# EAGLE board esp_pilote  x8A (EAGLE 8.0.0)
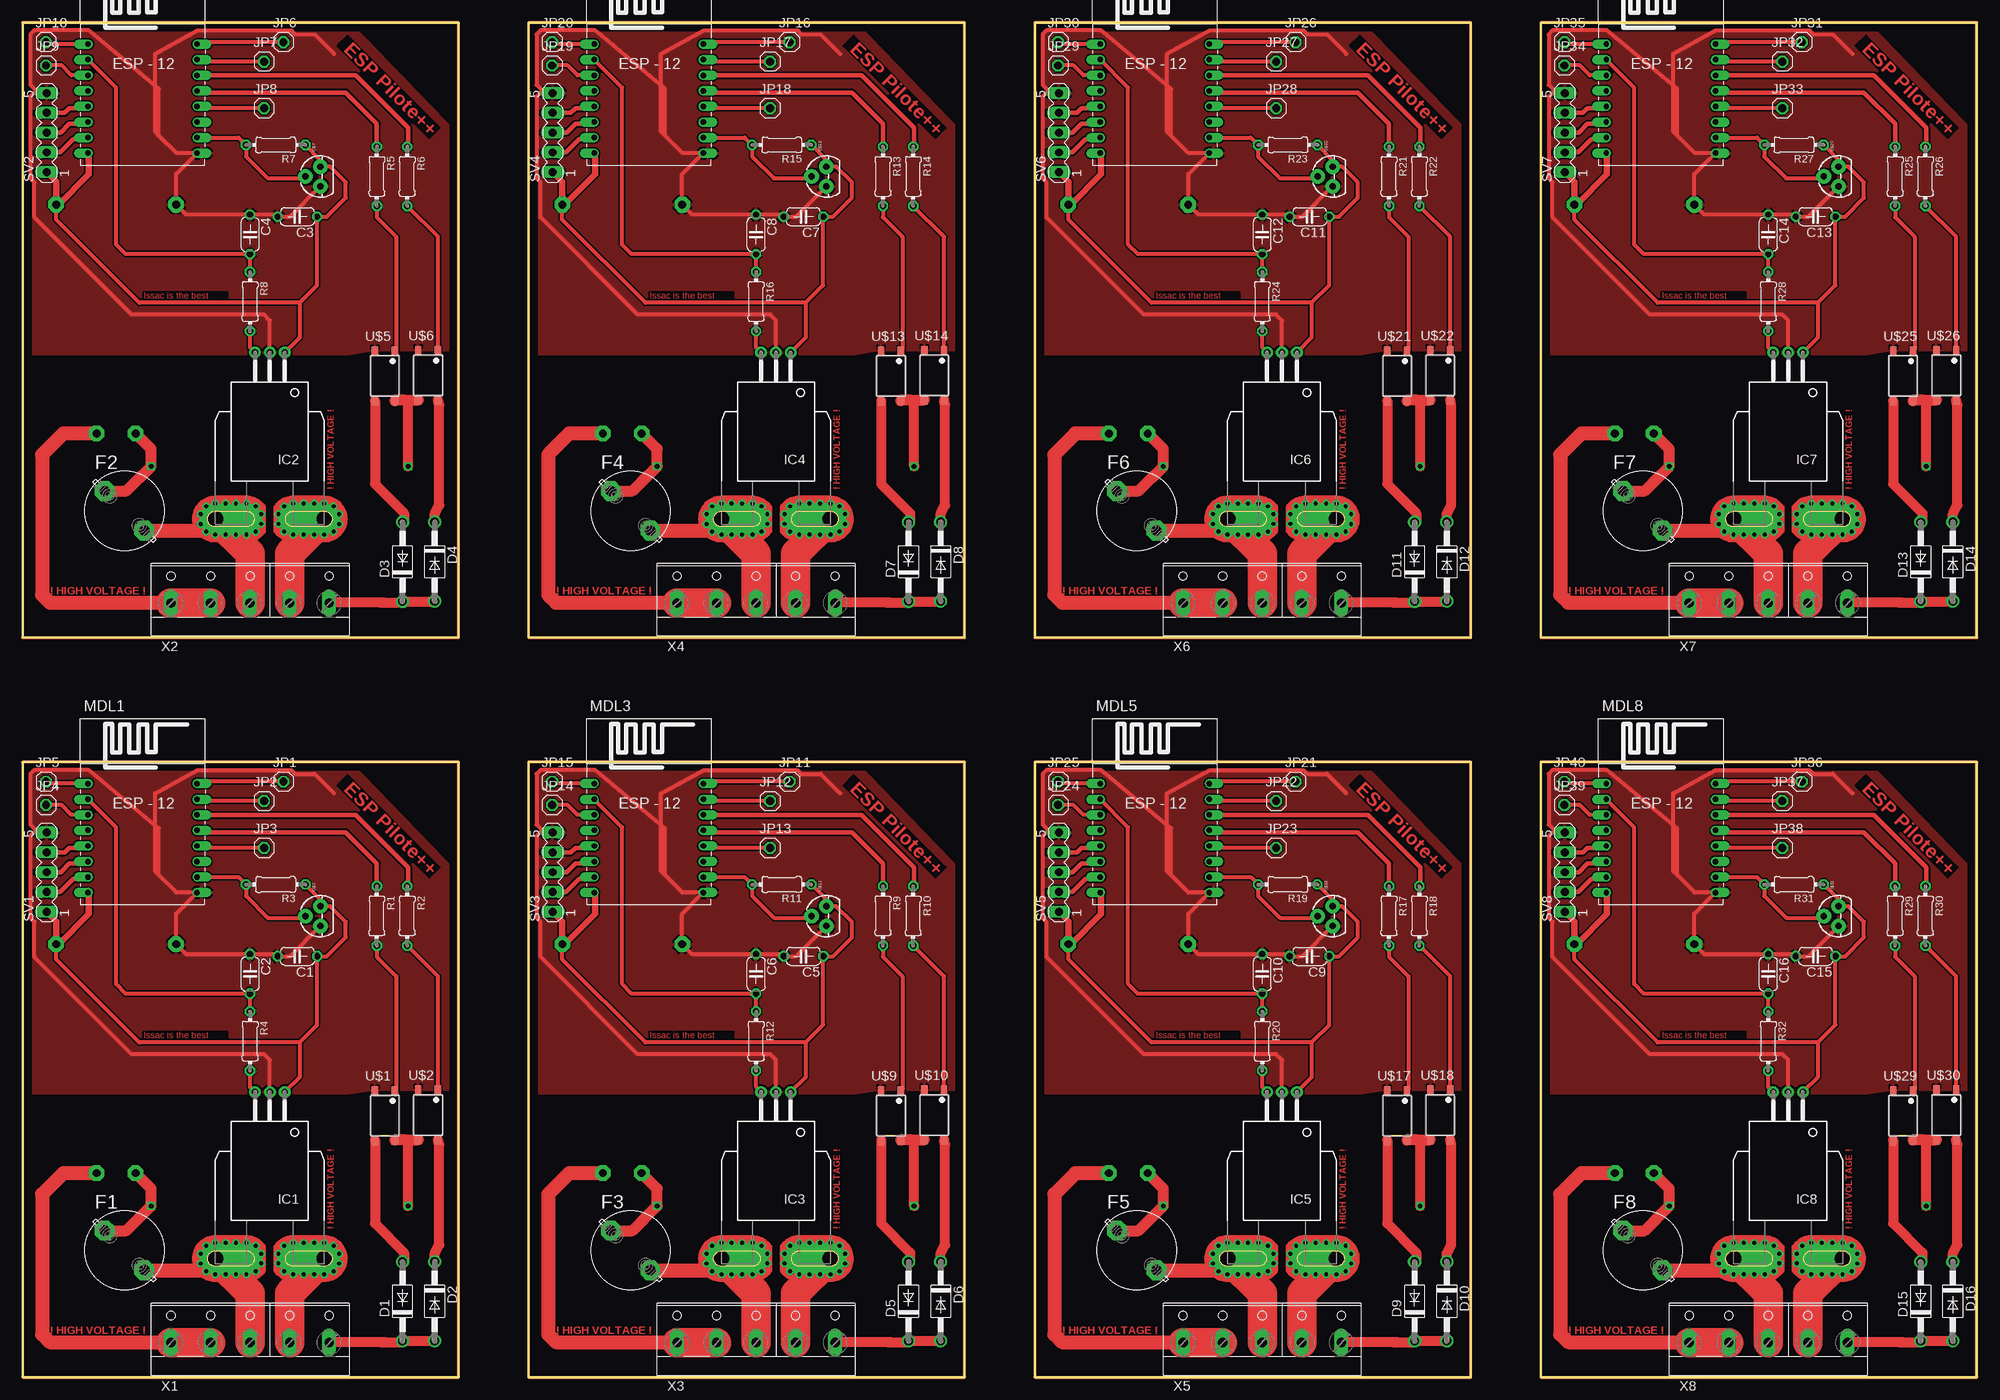
[diagram p0: board, top side]
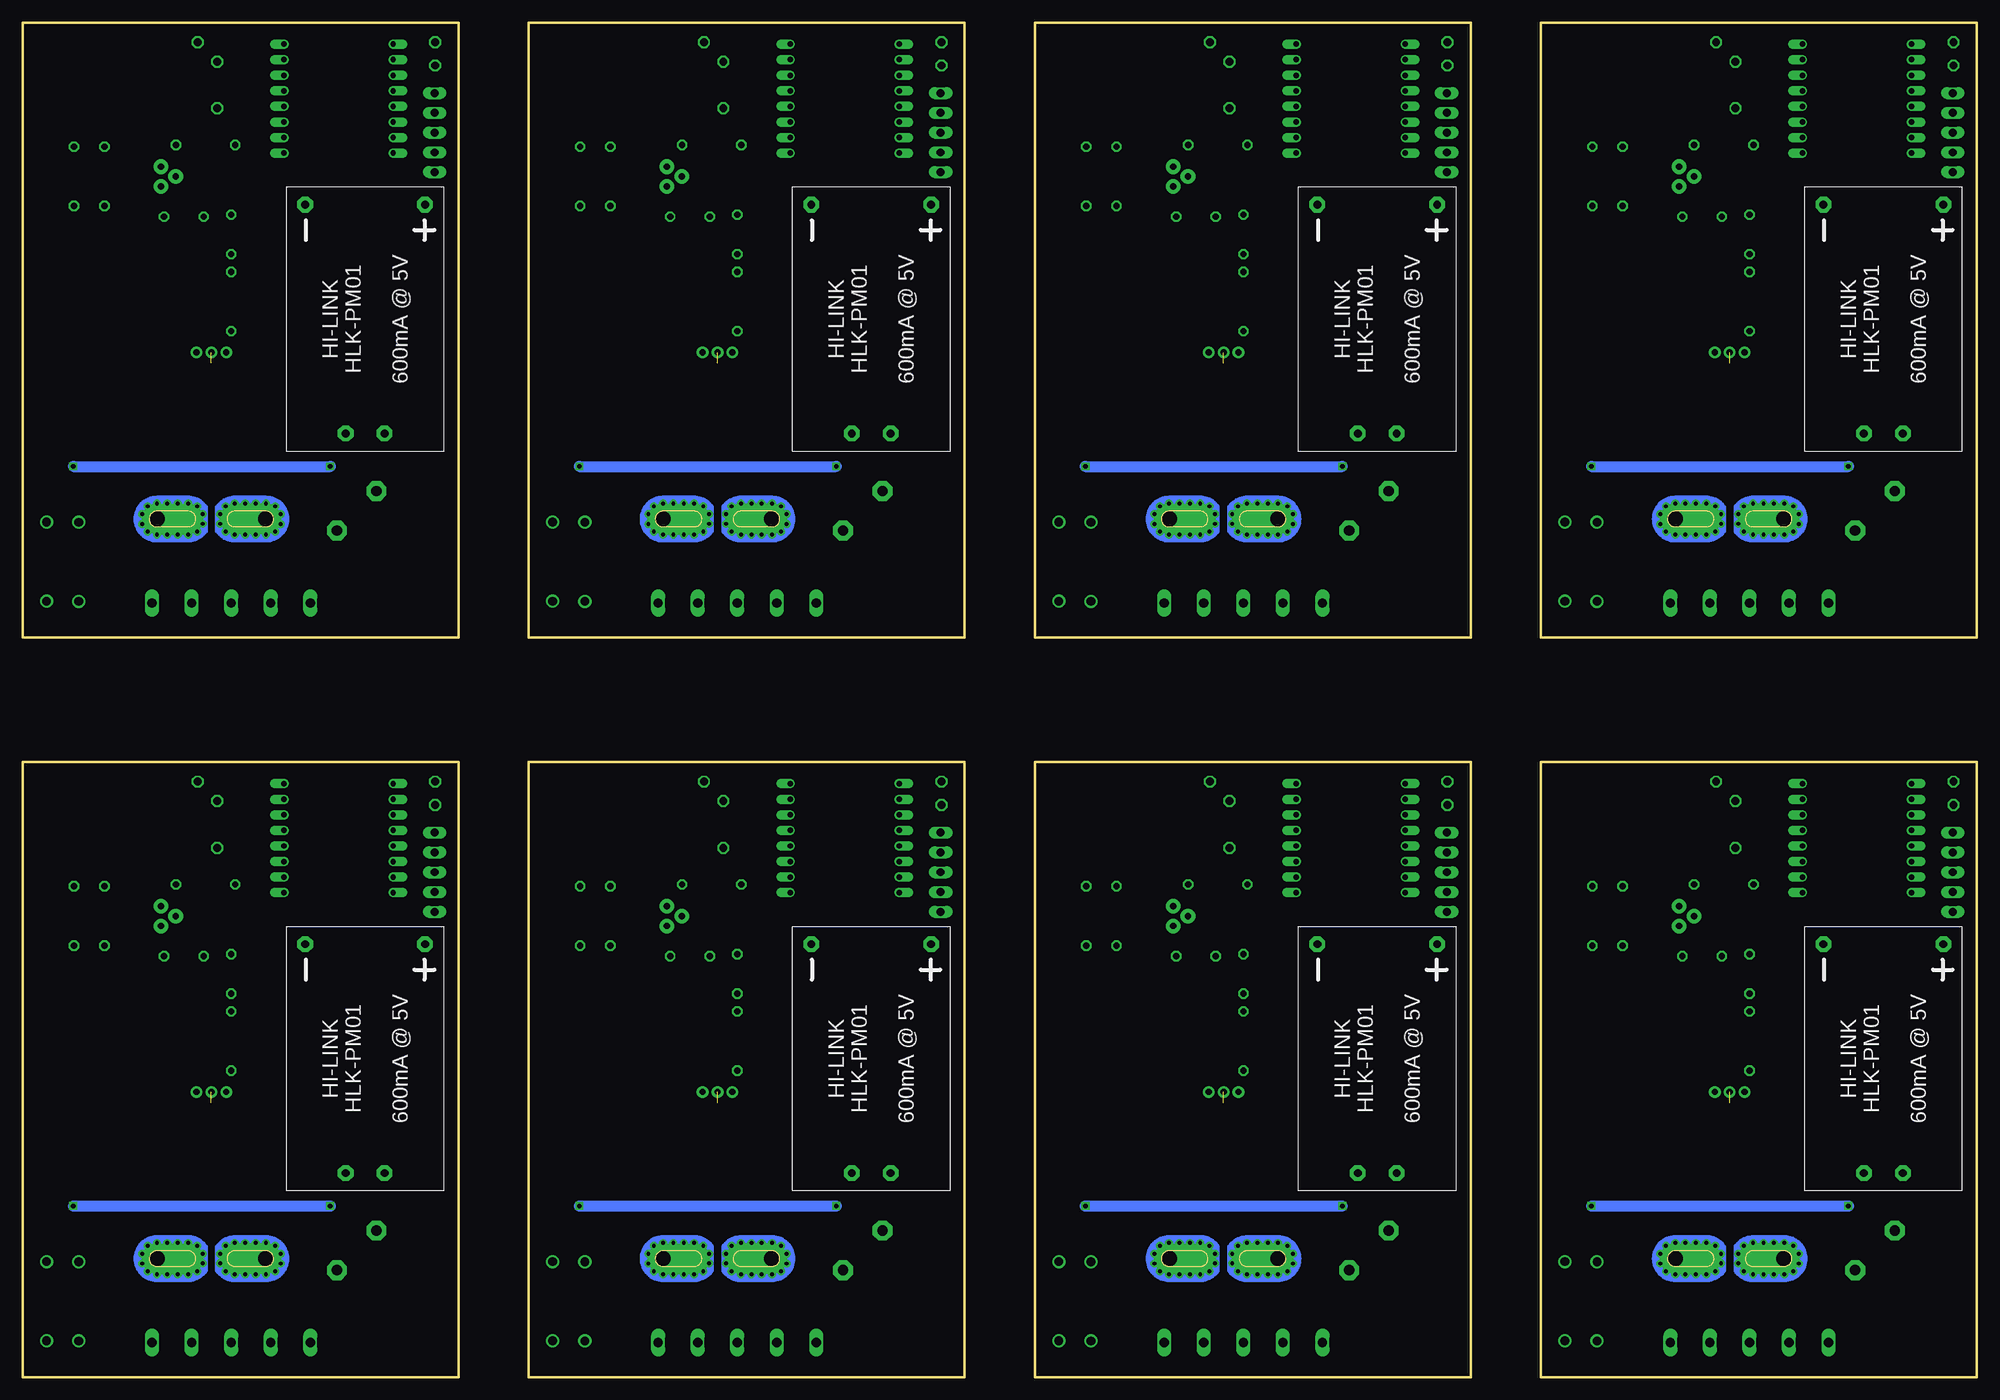
[diagram p1: board, bottom side, seen from below]

Size 251 x 174 mm. Coordinates in mm from the lower left corner, seen from the top.
Outline: 0,0 56,0 56,79 0,79 0,0
Outline: 0,95 56,95 56,174 0,174 0,95
Outline: 65,0 121,0 121,79 65,79 65,0
Outline: 65,95 121,95 121,174 65,174 65,95
Outline: 130,0 186,0 186,79 130,79 130,0
Outline: 130,95 186,95 186,174 130,174 130,95
Outline: 195,95 251,95 251,174 195,174 195,95
Outline: 195,0 251,0 251,79 195,79 195,0
Copper layers (1*16): Top 0.035mm / dielectric 1.5mm / Bottom 0.035mm
Design rules "default": minimum track width 10mil, minimum drill 24mil, track to track 8mil, track to pad 8mil, pad to pad 8mil, via to via 8mil, smd to smd 8mil, copper to edge 40mil, drill to drill 8mil, minimum pad ring 10mil, minimum via ring 8mil, stop-mask expansion 4mil, vias tented up to drill 0mil, thermal gap 10mil
Net classes: 0 default: width 0.5 mm; 1 15Amp: width 12 mm; 3 1Amp: width 0.3 mm

## Footprints (pad centres in the part's own frame; a part is rotated, then mirrored left to right if it is on the bottom)
C050-024X044 = drill 0.813 octagon: 1 -2.54,0; 2 2.54,0
DO41-10 = drill 1.118: A 5.08,0; C -5.08,0
19559 = drill 1.321 pad 2.54 octagon: 1 -2.54,2.54; 2 2.54,-2.54
CB-PFF = drill 0.8 pad 1.5: 1 -1.91,-21.4; 2 0,-21.4; 3 1.91,-21.4 | drill 2 pad 4 offset: IP+ 7,0; IP- -7,0 | drill 0.5 pad 0.9: IP+@2 8.89,0.635; IP+@3 8.89,-0.635; IP+@4 8.175,-1.625; IP+@5 7,-2; IP+@6 5.675,-2; IP+@7 4.35,-2; IP+@8 3,-2; IP+@9 1.825,-1.625; IP+@10 1.1,-0.625; IP+@11 1.1,0.625; IP+@12 1.825,1.625; IP+@13 3,2; IP+@14 4.35,2; IP+@15 5.675,2; IP+@16 7,2; IP+@17 8.175,1.625; IP-@2 -8.89,0.635; IP-@3 -8.89,-0.635; IP-@4 -8.175,-1.625; IP-@5 -7,-2; IP-@6 -5.675,-2; IP-@7 -4.325,-2; IP-@8 -3,-2; IP-@9 -1.825,-1.625; IP-@10 -1.1,-0.625; IP-@11 -1.1,0.625; IP-@12 -1.825,1.625; IP-@13 -3,2; IP-@14 -4.325,2; IP-@15 -5.675,2; IP-@16 -7,2; IP-@17 -8.175,1.625
1X01 = drill 1.016 octagon: 1 0,0
ESP12 = drill 0.7 offset: ADC -7.1,3.8; CH_PD -7.1,1.8; GND 6.9,-8.2; GPIO0 6.9,-2.2; GPIO2 6.9,-4.2; GPIO4 6.9,1.8; GPIO5 6.9,-0.2; GPIO12 -7.1,-4.2; GPIO13 -7.1,-6.2; GPIO14 -7.1,-2.2; GPIO15 6.9,-6.2; GPIO16 -7.1,-0.2; RESET -7.1,5.8; RX 6.9,3.8; TX 6.9,5.8; VCC -7.1,-8.2
0204/7 = drill 0.813 octagon: 1 -3.81,0; 2 3.81,0
MA05-1 = drill 1.016 long: 1 -5.08,0; 2 -2.54,0; 3 0,0; 4 2.54,0; 5 5.08,0
MFSOP-4 = smd 0.8 x 1.2: 1 2.54,0; 3 0,0; 4 0,-6.35; 6 2.54,-6.35
TO-92 = drill 0.813 pad 1.88: 1 -1.27,0; 2 0,1.905; 3 1.27,0
HLK-PM01 = drill 1 pad 2 octagon: AC_L -14.7,2.5; AC_N -14.7,-2.5; VO+ 14.7,-7.7; VO- 14.7,7.7
W237-5P = drill 1.194 long: 1 -10.16,-0.635; 2 -5.08,-0.635; 3 0,-0.635; 4 5.08,-0.635; 5 10.16,-0.635

## Placement (x,y rotation side)
C1  0,1µf  [C050-024X044]  35.29,54.07 180 top
C2  ?  [C050-024X044]  29.21,51.8 270 top
C3  0,1µf  [C050-024X044]  35.29,149.07 180 top
C4  ?  [C050-024X044]  29.21,146.8 270 top
C5  0,1µf  [C050-024X044]  100.29,54.07 180 top
C6  ?  [C050-024X044]  94.21,51.8 270 top
C7  0,1µf  [C050-024X044]  100.29,149.07 180 top
C8  ?  [C050-024X044]  94.21,146.8 270 top
C9  0,1µf  [C050-024X044]  165.29,54.07 180 top
C10  ?  [C050-024X044]  159.21,51.8 270 top
C11  0,1µf  [C050-024X044]  165.29,149.07 180 top
C12  ?  [C050-024X044]  159.21,146.8 270 top
C13  0,1µf  [C050-024X044]  230.29,149.07 180 top
C14  ?  [C050-024X044]  224.21,146.8 270 top
C15  0,1µf  [C050-024X044]  230.29,54.07 180 top
C16  ?  [C050-024X044]  224.21,51.8 270 top
D1  1N4007  [DO41-10]  48.79,9.75 90 top
D2  1N4007  [DO41-10]  52.92,9.76 270 top
D3  1N4007  [DO41-10]  48.79,104.75 90 top
D4  1N4007  [DO41-10]  52.92,104.76 270 top
D5  1N4007  [DO41-10]  113.79,9.75 90 top
D6  1N4007  [DO41-10]  117.92,9.76 270 top
D7  1N4007  [DO41-10]  113.79,104.75 90 top
D8  1N4007  [DO41-10]  117.92,104.76 270 top
D9  1N4007  [DO41-10]  178.79,9.75 90 top
D10  1N4007  [DO41-10]  182.92,9.76 270 top
D11  1N4007  [DO41-10]  178.79,104.75 90 top
D12  1N4007  [DO41-10]  182.92,104.76 270 top
D13  1N4007  [DO41-10]  243.79,104.75 90 top
D14  1N4007  [DO41-10]  247.92,104.76 270 top
D15  1N4007  [DO41-10]  243.79,9.75 90 top
D16  1N4007  [DO41-10]  247.92,9.76 270 top
F1  0,5A  [19559]  13.09,16.29 0 top
F2  0,5A  [19559]  13.09,111.29 0 top
F3  0,5A  [19559]  78.09,16.29 0 top
F4  0,5A  [19559]  78.09,111.29 0 top
F5  0,5A  [19559]  143.09,16.29 0 top
F6  0,5A  [19559]  143.09,111.29 0 top
F7  0,5A  [19559]  208.09,111.29 0 top
F8  0,5A  [19559]  208.09,16.29 0 top
IC1  ACS758LCB-050B-PFF-T  [CB-PFF]  31.75,15.24 180 top
IC2  ACS758LCB-050B-PFF-T  [CB-PFF]  31.75,110.24 180 top
IC3  ACS758LCB-050B-PFF-T  [CB-PFF]  96.75,15.24 180 top
IC4  ACS758LCB-050B-PFF-T  [CB-PFF]  96.75,110.24 180 top
IC5  ACS758LCB-050B-PFF-T  [CB-PFF]  161.75,15.24 180 top
IC6  ACS758LCB-050B-PFF-T  [CB-PFF]  161.75,110.24 180 top
IC7  ACS758LCB-050B-PFF-T  [CB-PFF]  226.75,110.24 180 top
IC8  ACS758LCB-050B-PFF-T  [CB-PFF]  226.75,15.24 180 top
JP1  [1X01]  33.5,76.5 0 top
JP2  [1X01]  31,74 0 top
JP3  [1X01]  31,68 0 top
JP4  [1X01]  3,73.5 0 top
JP5  [1X01]  3,76.5 0 top
JP6  [1X01]  33.5,171.5 0 top
JP7  [1X01]  31,169 0 top
JP8  [1X01]  31,163 0 top
JP9  [1X01]  3,168.5 0 top
JP10  [1X01]  3,171.5 0 top
JP11  [1X01]  98.5,76.5 0 top
JP12  [1X01]  96,74 0 top
JP13  [1X01]  96,68 0 top
JP14  [1X01]  68,73.5 0 top
JP15  [1X01]  68,76.5 0 top
JP16  [1X01]  98.5,171.5 0 top
JP17  [1X01]  96,169 0 top
JP18  [1X01]  96,163 0 top
JP19  [1X01]  68,168.5 0 top
JP20  [1X01]  68,171.5 0 top
JP21  [1X01]  163.5,76.5 0 top
JP22  [1X01]  161,74 0 top
JP23  [1X01]  161,68 0 top
JP24  [1X01]  133,73.5 0 top
JP25  [1X01]  133,76.5 0 top
JP26  [1X01]  163.5,171.5 0 top
JP27  [1X01]  161,169 0 top
JP28  [1X01]  161,163 0 top
JP29  [1X01]  133,168.5 0 top
JP30  [1X01]  133,171.5 0 top
JP31  [1X01]  228.5,171.5 0 top
JP32  [1X01]  226,169 0 top
JP33  [1X01]  226,163 0 top
JP34  [1X01]  198,168.5 0 top
JP35  [1X01]  198,171.5 0 top
JP36  [1X01]  228.5,76.5 0 top
JP37  [1X01]  226,74 0 top
JP38  [1X01]  226,68 0 top
JP39  [1X01]  198,73.5 0 top
JP40  [1X01]  198,76.5 0 top
MDL1  ESP  [ESP12]  15.51,70.44 0 top
MDL2  ESP  [ESP12]  15.51,165.44 0 top
MDL3  ESP  [ESP12]  80.51,70.44 0 top
MDL4  ESP  [ESP12]  80.51,165.44 0 top
MDL5  ESP  [ESP12]  145.51,70.44 0 top
MDL6  ESP  [ESP12]  145.51,165.44 0 top
MDL7  ESP  [ESP12]  210.51,165.44 0 top
MDL8  ESP  [ESP12]  210.51,70.44 0 top
R1  470  [0204/7]  45.5,59.26 270 top
R2  470  [0204/7]  49.39,59.26 270 top
R3  4.7k  [0204/7]  32.5,63.29 180 top
R4  ?  [0204/7]  29.21,43.18 270 top
R5  470  [0204/7]  45.5,154.26 270 top
R6  470  [0204/7]  49.39,154.26 270 top
R7  4.7k  [0204/7]  32.5,158.29 180 top
R8  ?  [0204/7]  29.21,138.18 270 top
R9  470  [0204/7]  110.5,59.26 270 top
R10  470  [0204/7]  114.39,59.26 270 top
R11  4.7k  [0204/7]  97.5,63.29 180 top
R12  ?  [0204/7]  94.21,43.18 270 top
R13  470  [0204/7]  110.5,154.26 270 top
R14  470  [0204/7]  114.39,154.26 270 top
R15  4.7k  [0204/7]  97.5,158.29 180 top
R16  ?  [0204/7]  94.21,138.18 270 top
R17  470  [0204/7]  175.5,59.26 270 top
R18  470  [0204/7]  179.39,59.26 270 top
R19  4.7k  [0204/7]  162.5,63.29 180 top
R20  ?  [0204/7]  159.21,43.18 270 top
R21  470  [0204/7]  175.5,154.26 270 top
R22  470  [0204/7]  179.39,154.26 270 top
R23  4.7k  [0204/7]  162.5,158.29 180 top
R24  ?  [0204/7]  159.21,138.18 270 top
R25  470  [0204/7]  240.5,154.26 270 top
R26  470  [0204/7]  244.39,154.26 270 top
R27  4.7k  [0204/7]  227.5,158.29 180 top
R28  ?  [0204/7]  224.21,138.18 270 top
R29  470  [0204/7]  240.5,59.26 270 top
R30  470  [0204/7]  244.39,59.26 270 top
R31  4.7k  [0204/7]  227.5,63.29 180 top
R32  ?  [0204/7]  224.21,43.18 270 top
SV1  [MA05-1]  3.09,64.87 90 top
SV2  [MA05-1]  3.09,159.87 90 top
SV3  [MA05-1]  68.09,64.87 90 top
SV4  [MA05-1]  68.09,159.87 90 top
SV5  [MA05-1]  133.09,64.87 90 top
SV6  [MA05-1]  133.09,159.87 90 top
SV7  [MA05-1]  198.09,159.87 90 top
SV8  [MA05-1]  198.09,64.87 90 top
U$1  TLP168J  [MFSOP-4]  45.26,36.79 0 top
U$2  TLP168J  [MFSOP-4]  50.81,36.87 0 top
U$3  TEMPERATURE-SENSOR  [TO-92]  38.24,59.23 90 top
U$4  MAINS_CONVERTERS  [HLK-PM01]  12.01,40.92 90 bottom
U$5  TLP168J  [MFSOP-4]  45.26,131.79 0 top
U$6  TLP168J  [MFSOP-4]  50.81,131.87 0 top
U$7  TEMPERATURE-SENSOR  [TO-92]  38.24,154.23 90 top
U$8  MAINS_CONVERTERS  [HLK-PM01]  12.01,135.92 90 bottom
U$9  TLP168J  [MFSOP-4]  110.26,36.79 0 top
U$10  TLP168J  [MFSOP-4]  115.81,36.87 0 top
U$11  TEMPERATURE-SENSOR  [TO-92]  103.24,59.23 90 top
U$12  MAINS_CONVERTERS  [HLK-PM01]  77.01,40.92 90 bottom
U$13  TLP168J  [MFSOP-4]  110.26,131.79 0 top
U$14  TLP168J  [MFSOP-4]  115.81,131.87 0 top
U$15  TEMPERATURE-SENSOR  [TO-92]  103.24,154.23 90 top
U$16  MAINS_CONVERTERS  [HLK-PM01]  77.01,135.92 90 bottom
U$17  TLP168J  [MFSOP-4]  175.26,36.79 0 top
U$18  TLP168J  [MFSOP-4]  180.81,36.87 0 top
U$19  TEMPERATURE-SENSOR  [TO-92]  168.24,59.23 90 top
U$20  MAINS_CONVERTERS  [HLK-PM01]  142.01,40.92 90 bottom
U$21  TLP168J  [MFSOP-4]  175.26,131.79 0 top
U$22  TLP168J  [MFSOP-4]  180.81,131.87 0 top
U$23  TEMPERATURE-SENSOR  [TO-92]  168.24,154.23 90 top
U$24  MAINS_CONVERTERS  [HLK-PM01]  142.01,135.92 90 bottom
U$25  TLP168J  [MFSOP-4]  240.26,131.79 0 top
U$26  TLP168J  [MFSOP-4]  245.81,131.87 0 top
U$27  TEMPERATURE-SENSOR  [TO-92]  233.24,154.23 90 top
U$28  MAINS_CONVERTERS  [HLK-PM01]  207.01,135.92 90 bottom
U$29  TLP168J  [MFSOP-4]  240.26,36.79 0 top
U$30  TLP168J  [MFSOP-4]  245.81,36.87 0 top
U$31  TEMPERATURE-SENSOR  [TO-92]  233.24,59.23 90 top
U$32  MAINS_CONVERTERS  [HLK-PM01]  207.01,40.92 90 bottom
X1  [W237-5P]  29.21,5.08 0 top
X2  [W237-5P]  29.21,100.08 0 top
X3  [W237-5P]  94.21,5.08 0 top
X4  [W237-5P]  94.21,100.08 0 top
X5  [W237-5P]  159.21,5.08 0 top
X6  [W237-5P]  159.21,100.08 0 top
X7  [W237-5P]  224.21,100.08 0 top
X8  [W237-5P]  224.21,5.08 0 top

## Library data of the parts
C1-C16 = resistor
D1-D16 = diode
F1-F8 = fuse; MPN: 55900000001; OC_FARNELL: 9516360; OC_NEWARK: 02P0286
IC1-IC8 = allegro; MPN: ACS758LCB-050B-PFF-T; OC_FARNELL: 1718997; OC_NEWARK: 04R7131
JP1-JP40 = pinhead
MDL1-MDL8 = esp8266modules
R1-R32 = rcl
SV1-SV8 = con-lstb; OC_FARNELL: unknown; OC_NEWARK: unknown
U$1 U$2 U$5 U$6 U$9 U$10 U$13 U$14 U$17 U$18 U$21 U$22 U$25 U$26 U$29 U$30 = TLP168J
U$3 U$7 U$11 U$15 U$19 U$23 U$27 U$31 = Eagle-JeeLabs
U$4 U$8 U$12 U$16 U$20 U$24 U$28 U$32 = captain-slow
X1-X8 = con-wago-508; OC_FARNELL: unknown; OC_NEWARK: unknown

## Nets
230FUSED [1Amp]: F1.1 U$1.6 U$2.4 U$4.AC_L
230FUSED1 [1Amp]: F2.1 U$5.6 U$6.4 U$8.AC_L
230FUSED2 [1Amp]: F3.1 U$9.6 U$10.4 U$12.AC_L
230FUSED3 [1Amp]: F4.1 U$13.6 U$14.4 U$16.AC_L
230FUSED4 [1Amp]: F5.1 U$17.6 U$18.4 U$20.AC_L
230FUSED5 [1Amp]: F6.1 U$21.6 U$22.4 U$24.AC_L
230FUSED6 [1Amp]: F7.1 U$25.6 U$26.4 U$28.AC_L
230FUSED7 [1Amp]: F8.1 U$29.6 U$30.4 U$32.AC_L
230IN [15Amp]: F1.2 IC1.IP+ IC1.IP+@2 IC1.IP+@3 IC1.IP+@4 IC1.IP+@5 IC1.IP+@6 IC1.IP+@7 IC1.IP+@8 IC1.IP+@9 IC1.IP+@10 IC1.IP+@11 IC1.IP+@12 IC1.IP+@13 IC1.IP+@14 IC1.IP+@15 IC1.IP+@16 IC1.IP+@17 X1.3
230IN1 [15Amp]: F2.2 IC2.IP+ IC2.IP+@2 IC2.IP+@3 IC2.IP+@4 IC2.IP+@5 IC2.IP+@6 IC2.IP+@7 IC2.IP+@8 IC2.IP+@9 IC2.IP+@10 IC2.IP+@11 IC2.IP+@12 IC2.IP+@13 IC2.IP+@14 IC2.IP+@15 IC2.IP+@16 IC2.IP+@17 X2.3
230IN2 [15Amp]: F3.2 IC3.IP+ IC3.IP+@2 IC3.IP+@3 IC3.IP+@4 IC3.IP+@5 IC3.IP+@6 IC3.IP+@7 IC3.IP+@8 IC3.IP+@9 IC3.IP+@10 IC3.IP+@11 IC3.IP+@12 IC3.IP+@13 IC3.IP+@14 IC3.IP+@15 IC3.IP+@16 IC3.IP+@17 X3.3
230IN3 [15Amp]: F4.2 IC4.IP+ IC4.IP+@2 IC4.IP+@3 IC4.IP+@4 IC4.IP+@5 IC4.IP+@6 IC4.IP+@7 IC4.IP+@8 IC4.IP+@9 IC4.IP+@10 IC4.IP+@11 IC4.IP+@12 IC4.IP+@13 IC4.IP+@14 IC4.IP+@15 IC4.IP+@16 IC4.IP+@17 X4.3
230IN4 [15Amp]: F5.2 IC5.IP+ IC5.IP+@2 IC5.IP+@3 IC5.IP+@4 IC5.IP+@5 IC5.IP+@6 IC5.IP+@7 IC5.IP+@8 IC5.IP+@9 IC5.IP+@10 IC5.IP+@11 IC5.IP+@12 IC5.IP+@13 IC5.IP+@14 IC5.IP+@15 IC5.IP+@16 IC5.IP+@17 X5.3
230IN5 [15Amp]: F6.2 IC6.IP+ IC6.IP+@2 IC6.IP+@3 IC6.IP+@4 IC6.IP+@5 IC6.IP+@6 IC6.IP+@7 IC6.IP+@8 IC6.IP+@9 IC6.IP+@10 IC6.IP+@11 IC6.IP+@12 IC6.IP+@13 IC6.IP+@14 IC6.IP+@15 IC6.IP+@16 IC6.IP+@17 X6.3
230IN6 [15Amp]: F7.2 IC7.IP+ IC7.IP+@2 IC7.IP+@3 IC7.IP+@4 IC7.IP+@5 IC7.IP+@6 IC7.IP+@7 IC7.IP+@8 IC7.IP+@9 IC7.IP+@10 IC7.IP+@11 IC7.IP+@12 IC7.IP+@13 IC7.IP+@14 IC7.IP+@15 IC7.IP+@16 IC7.IP+@17 X7.3
230IN7 [15Amp]: F8.2 IC8.IP+ IC8.IP+@2 IC8.IP+@3 IC8.IP+@4 IC8.IP+@5 IC8.IP+@6 IC8.IP+@7 IC8.IP+@8 IC8.IP+@9 IC8.IP+@10 IC8.IP+@11 IC8.IP+@12 IC8.IP+@13 IC8.IP+@14 IC8.IP+@15 IC8.IP+@16 IC8.IP+@17 X8.3
230OUT [15Amp]: IC1.IP- IC1.IP-@2 IC1.IP-@3 IC1.IP-@4 IC1.IP-@5 IC1.IP-@6 IC1.IP-@7 IC1.IP-@8 IC1.IP-@9 IC1.IP-@10 IC1.IP-@11 IC1.IP-@12 IC1.IP-@13 IC1.IP-@14 IC1.IP-@15 IC1.IP-@16 IC1.IP-@17 X1.4
230OUT1 [15Amp]: IC2.IP- IC2.IP-@2 IC2.IP-@3 IC2.IP-@4 IC2.IP-@5 IC2.IP-@6 IC2.IP-@7 IC2.IP-@8 IC2.IP-@9 IC2.IP-@10 IC2.IP-@11 IC2.IP-@12 IC2.IP-@13 IC2.IP-@14 IC2.IP-@15 IC2.IP-@16 IC2.IP-@17 X2.4
230OUT2 [15Amp]: IC3.IP- IC3.IP-@2 IC3.IP-@3 IC3.IP-@4 IC3.IP-@5 IC3.IP-@6 IC3.IP-@7 IC3.IP-@8 IC3.IP-@9 IC3.IP-@10 IC3.IP-@11 IC3.IP-@12 IC3.IP-@13 IC3.IP-@14 IC3.IP-@15 IC3.IP-@16 IC3.IP-@17 X3.4
230OUT3 [15Amp]: IC4.IP- IC4.IP-@2 IC4.IP-@3 IC4.IP-@4 IC4.IP-@5 IC4.IP-@6 IC4.IP-@7 IC4.IP-@8 IC4.IP-@9 IC4.IP-@10 IC4.IP-@11 IC4.IP-@12 IC4.IP-@13 IC4.IP-@14 IC4.IP-@15 IC4.IP-@16 IC4.IP-@17 X4.4
230OUT4 [15Amp]: IC5.IP- IC5.IP-@2 IC5.IP-@3 IC5.IP-@4 IC5.IP-@5 IC5.IP-@6 IC5.IP-@7 IC5.IP-@8 IC5.IP-@9 IC5.IP-@10 IC5.IP-@11 IC5.IP-@12 IC5.IP-@13 IC5.IP-@14 IC5.IP-@15 IC5.IP-@16 IC5.IP-@17 X5.4
230OUT5 [15Amp]: IC6.IP- IC6.IP-@2 IC6.IP-@3 IC6.IP-@4 IC6.IP-@5 IC6.IP-@6 IC6.IP-@7 IC6.IP-@8 IC6.IP-@9 IC6.IP-@10 IC6.IP-@11 IC6.IP-@12 IC6.IP-@13 IC6.IP-@14 IC6.IP-@15 IC6.IP-@16 IC6.IP-@17 X6.4
230OUT6 [15Amp]: IC7.IP- IC7.IP-@2 IC7.IP-@3 IC7.IP-@4 IC7.IP-@5 IC7.IP-@6 IC7.IP-@7 IC7.IP-@8 IC7.IP-@9 IC7.IP-@10 IC7.IP-@11 IC7.IP-@12 IC7.IP-@13 IC7.IP-@14 IC7.IP-@15 IC7.IP-@16 IC7.IP-@17 X7.4
230OUT7 [15Amp]: IC8.IP- IC8.IP-@2 IC8.IP-@3 IC8.IP-@4 IC8.IP-@5 IC8.IP-@6 IC8.IP-@7 IC8.IP-@8 IC8.IP-@9 IC8.IP-@10 IC8.IP-@11 IC8.IP-@12 IC8.IP-@13 IC8.IP-@14 IC8.IP-@15 IC8.IP-@16 IC8.IP-@17 X8.4
CURRENT: C2.2 MDL1.ADC R4.1
CURRENT1: C4.2 MDL2.ADC R8.1
CURRENT2: C6.2 MDL3.ADC R12.1
CURRENT3: C8.2 MDL4.ADC R16.1
CURRENT4: C10.2 MDL5.ADC R20.1
CURRENT5: C12.2 MDL6.ADC R24.1
CURRENT6: C14.2 MDL7.ADC R28.1
CURRENT7: C16.2 MDL8.ADC R32.1
GND: C1.2 C2.1 IC1.2 MDL1.GND SV1.5 U$1.3 U$2.3 U$3.1 U$4.VO-
GND1: C3.2 C4.1 IC2.2 MDL2.GND SV2.5 U$5.3 U$6.3 U$7.1 U$8.VO-
GND2: C5.2 C6.1 IC3.2 MDL3.GND SV3.5 U$9.3 U$10.3 U$11.1 U$12.VO-
GND3: C7.2 C8.1 IC4.2 MDL4.GND SV4.5 U$13.3 U$14.3 U$15.1 U$16.VO-
GND4: C9.2 C10.1 IC5.2 MDL5.GND SV5.5 U$17.3 U$18.3 U$19.1 U$20.VO-
GND5: C11.2 C12.1 IC6.2 MDL6.GND SV6.5 U$21.3 U$22.3 U$23.1 U$24.VO-
GND6: C13.2 C14.1 IC7.2 MDL7.GND SV7.5 U$25.3 U$26.3 U$27.1 U$28.VO-
GND7: C15.2 C16.1 IC8.2 MDL8.GND SV8.5 U$29.3 U$30.3 U$31.1 U$32.VO-
N$1 [1Amp]: D2.C U$2.6
N$2: R1.2 U$1.1
N$3: IC1.3 R4.2
N$4 [1Amp]: D1.A U$1.4
N$5 [1Amp]: MDL1.GPIO13 SV1.2
N$6 [1Amp]: MDL1.GPIO12 SV1.3
N$7 [1Amp]: MDL1.GPIO14 SV1.4
N$8: R2.2 U$2.1
N$9: MDL1.GPIO15 R3.2 U$3.2
N$10 [1Amp]: MDL1.GPIO5 R1.1
N$11 [1Amp]: MDL1.GPIO4 R2.1
N$13: JP4.1 MDL1.CH_PD
N$14: JP1.1 MDL1.TX
N$15: JP2.1 MDL1.RX
N$16: JP3.1 MDL1.GPIO0
N$17: JP5.1 MDL1.RESET
N$18: R5.2 U$5.1
N$19: R6.2 U$6.1
N$20: IC2.3 R8.2
N$21 [1Amp]: D3.A U$5.4
N$22 [1Amp]: D4.C U$6.6
N$23 [1Amp]: MDL2.GPIO13 SV2.2
N$24 [1Amp]: MDL2.GPIO12 SV2.3
N$25 [1Amp]: MDL2.GPIO14 SV2.4
N$26: MDL2.GPIO15 R7.2 U$7.2
N$27 [1Amp]: MDL2.GPIO5 R5.1
N$28 [1Amp]: MDL2.GPIO4 R6.1
N$30: JP9.1 MDL2.CH_PD
N$31: JP6.1 MDL2.TX
N$32: JP7.1 MDL2.RX
N$33: JP8.1 MDL2.GPIO0
N$34: JP10.1 MDL2.RESET
N$35: R9.2 U$9.1
N$36: R10.2 U$10.1
N$37: IC3.3 R12.2
N$38 [1Amp]: D5.A U$9.4
N$39 [1Amp]: D6.C U$10.6
N$40 [1Amp]: MDL3.GPIO13 SV3.2
N$41 [1Amp]: MDL3.GPIO12 SV3.3
N$42 [1Amp]: MDL3.GPIO14 SV3.4
N$43: MDL3.GPIO15 R11.2 U$11.2
N$44 [1Amp]: MDL3.GPIO5 R9.1
N$45 [1Amp]: MDL3.GPIO4 R10.1
N$47: JP14.1 MDL3.CH_PD
N$48: JP11.1 MDL3.TX
N$49: JP12.1 MDL3.RX
N$50: JP13.1 MDL3.GPIO0
N$51: JP15.1 MDL3.RESET
N$52: R13.2 U$13.1
N$53: R14.2 U$14.1
N$54: IC4.3 R16.2
N$55 [1Amp]: D7.A U$13.4
N$56 [1Amp]: D8.C U$14.6
N$57 [1Amp]: MDL4.GPIO13 SV4.2
N$58 [1Amp]: MDL4.GPIO12 SV4.3
N$59 [1Amp]: MDL4.GPIO14 SV4.4
N$60: MDL4.GPIO15 R15.2 U$15.2
N$61 [1Amp]: MDL4.GPIO5 R13.1
N$62 [1Amp]: MDL4.GPIO4 R14.1
N$64: JP19.1 MDL4.CH_PD
N$65: JP16.1 MDL4.TX
N$66: JP17.1 MDL4.RX
N$67: JP18.1 MDL4.GPIO0
N$68: JP20.1 MDL4.RESET
N$69: R17.2 U$17.1
N$70: R18.2 U$18.1
N$71: IC5.3 R20.2
N$72 [1Amp]: D9.A U$17.4
N$73 [1Amp]: D10.C U$18.6
N$74 [1Amp]: MDL5.GPIO13 SV5.2
N$75 [1Amp]: MDL5.GPIO12 SV5.3
N$76 [1Amp]: MDL5.GPIO14 SV5.4
N$77: MDL5.GPIO15 R19.2 U$19.2
N$78 [1Amp]: MDL5.GPIO5 R17.1
N$79 [1Amp]: MDL5.GPIO4 R18.1
N$81: JP24.1 MDL5.CH_PD
N$82: JP21.1 MDL5.TX
N$83: JP22.1 MDL5.RX
N$84: JP23.1 MDL5.GPIO0
N$85: JP25.1 MDL5.RESET
N$86: R21.2 U$21.1
N$87: R22.2 U$22.1
N$88: IC6.3 R24.2
N$89 [1Amp]: D11.A U$21.4
N$90 [1Amp]: D12.C U$22.6
N$91 [1Amp]: MDL6.GPIO13 SV6.2
N$92 [1Amp]: MDL6.GPIO12 SV6.3
N$93 [1Amp]: MDL6.GPIO14 SV6.4
N$94: MDL6.GPIO15 R23.2 U$23.2
N$95 [1Amp]: MDL6.GPIO5 R21.1
N$96 [1Amp]: MDL6.GPIO4 R22.1
N$98: JP29.1 MDL6.CH_PD
N$99: JP26.1 MDL6.TX
N$100: JP27.1 MDL6.RX
N$101: JP28.1 MDL6.GPIO0
N$102: JP30.1 MDL6.RESET
N$103: R25.2 U$25.1
N$104: R26.2 U$26.1
N$105: IC7.3 R28.2
N$106 [1Amp]: D13.A U$25.4
N$107 [1Amp]: D14.C U$26.6
N$108 [1Amp]: MDL7.GPIO13 SV7.2
N$109 [1Amp]: MDL7.GPIO12 SV7.3
N$110 [1Amp]: MDL7.GPIO14 SV7.4
N$111: MDL7.GPIO15 R27.2 U$27.2
N$112 [1Amp]: MDL7.GPIO5 R25.1
N$113 [1Amp]: MDL7.GPIO4 R26.1
N$115: JP34.1 MDL7.CH_PD
N$116: JP31.1 MDL7.TX
N$117: JP32.1 MDL7.RX
N$118: JP33.1 MDL7.GPIO0
N$119: JP35.1 MDL7.RESET
N$120: R29.2 U$29.1
N$121: R30.2 U$30.1
N$122: IC8.3 R32.2
N$123 [1Amp]: D15.A U$29.4
N$124 [1Amp]: D16.C U$30.6
N$125 [1Amp]: MDL8.GPIO13 SV8.2
N$126 [1Amp]: MDL8.GPIO12 SV8.3
N$127 [1Amp]: MDL8.GPIO14 SV8.4
N$128: MDL8.GPIO15 R31.2 U$31.2
N$129 [1Amp]: MDL8.GPIO5 R29.1
N$130 [1Amp]: MDL8.GPIO4 R30.1
N$132: JP39.1 MDL8.CH_PD
N$133: JP36.1 MDL8.TX
N$134: JP37.1 MDL8.RX
N$135: JP38.1 MDL8.GPIO0
N$136: JP40.1 MDL8.RESET
NEUTRAL [15Amp]: U$4.AC_N X1.1 X1.2
NEUTRAL1 [15Amp]: U$8.AC_N X2.1 X2.2
NEUTRAL2 [15Amp]: U$12.AC_N X3.1 X3.2
NEUTRAL3 [15Amp]: U$16.AC_N X4.1 X4.2
NEUTRAL4 [15Amp]: U$20.AC_N X5.1 X5.2
NEUTRAL5 [15Amp]: U$24.AC_N X6.1 X6.2
NEUTRAL6 [15Amp]: U$28.AC_N X7.1 X7.2
NEUTRAL7 [15Amp]: U$32.AC_N X8.1 X8.2
PILOTE [1Amp]: D1.C D2.A X1.5
PILOTE1 [1Amp]: D3.C D4.A X2.5
PILOTE2 [1Amp]: D5.C D6.A X3.5
PILOTE3 [1Amp]: D7.C D8.A X4.5
PILOTE4 [1Amp]: D9.C D10.A X5.5
PILOTE5 [1Amp]: D11.C D12.A X6.5
PILOTE6 [1Amp]: D13.C D14.A X7.5
PILOTE7 [1Amp]: D15.C D16.A X8.5
VCC: C1.1 IC1.1 MDL1.VCC R3.1 SV1.1 U$3.3 U$4.VO+
VCC1: C3.1 IC2.1 MDL2.VCC R7.1 SV2.1 U$7.3 U$8.VO+
VCC2: C5.1 IC3.1 MDL3.VCC R11.1 SV3.1 U$11.3 U$12.VO+
VCC3: C7.1 IC4.1 MDL4.VCC R15.1 SV4.1 U$15.3 U$16.VO+
VCC4: C9.1 IC5.1 MDL5.VCC R19.1 SV5.1 U$19.3 U$20.VO+
VCC5: C11.1 IC6.1 MDL6.VCC R23.1 SV6.1 U$23.3 U$24.VO+
VCC6: C13.1 IC7.1 MDL7.VCC R27.1 SV7.1 U$27.3 U$28.VO+
VCC7: C15.1 IC8.1 MDL8.VCC R31.1 SV8.1 U$31.3 U$32.VO+

## Tracks (layer width: path | path; a pad name or v marks a point on that pad's centre or on a via)
230FUSED  (via drill 0.61)
  Top 1.27: v49.5,22 49.5,30.02 49,30.52 | F1.1 13.33,18.83 14.33,19.83
  Top 1.422: v16.5,22 14.33,19.83 | v16.5,22 16.5,24.23 U$4.AC_L | U$2.4 49,30.52 47.88,30.52 U$1.6 | F1.1 13.33,18.83 v16.5,22
  Bottom 1.422: v49.5,22 v16.5,22
230FUSED1  (via drill 0.61)
  Top 1.27: v49.5,117 49.5,125.02 49,125.52 | F2.1 13.33,113.83 14.33,114.83
  Top 1.422: v16.5,117 14.33,114.83 | v16.5,117 16.5,119.23 U$8.AC_L | U$6.4 49,125.52 47.88,125.52 U$5.6 | F2.1 13.33,113.83 v16.5,117
  Bottom 1.422: v49.5,117 v16.5,117
230FUSED2  (via drill 0.61)
  Top 1.27: v114.5,22 114.5,30.02 114,30.52 | F3.1 78.33,18.83 79.33,19.83
  Top 1.422: v81.5,22 79.33,19.83 | v81.5,22 81.5,24.23 U$12.AC_L | U$10.4 114,30.52 112.88,30.52 U$9.6 | F3.1 78.33,18.83 v81.5,22
  Bottom 1.422: v114.5,22 v81.5,22
230FUSED3  (via drill 0.61)
  Top 1.27: v114.5,117 114.5,125.02 114,125.52 | F4.1 78.33,113.83 79.33,114.83
  Top 1.422: v81.5,117 79.33,114.83 | v81.5,117 81.5,119.23 U$16.AC_L | U$14.4 114,125.52 112.88,125.52 U$13.6 | F4.1 78.33,113.83 v81.5,117
  Bottom 1.422: v114.5,117 v81.5,117
230FUSED4  (via drill 0.61)
  Top 1.27: v179.5,22 179.5,30.02 179,30.52 | F5.1 143.33,18.83 144.33,19.83
  Top 1.422: v146.5,22 144.33,19.83 | v146.5,22 146.5,24.23 U$20.AC_L | U$18.4 179,30.52 177.88,30.52 U$17.6 | F5.1 143.33,18.83 v146.5,22
  Bottom 1.422: v179.5,22 v146.5,22
230FUSED5  (via drill 0.61)
  Top 1.27: v179.5,117 179.5,125.02 179,125.52 | F6.1 143.33,113.83 144.33,114.83
  Top 1.422: v146.5,117 144.33,114.83 | v146.5,117 146.5,119.23 U$24.AC_L | U$22.4 179,125.52 177.88,125.52 U$21.6 | F6.1 143.33,113.83 v146.5,117
  Bottom 1.422: v179.5,117 v146.5,117
230FUSED6  (via drill 0.61)
  Top 1.27: v244.5,117 244.5,125.02 244,125.52 | F7.1 208.33,113.83 209.33,114.83
  Top 1.422: v211.5,117 209.33,114.83 | v211.5,117 211.5,119.23 U$28.AC_L | U$26.4 244,125.52 242.88,125.52 U$25.6 | F7.1 208.33,113.83 v211.5,117
  Bottom 1.422: v244.5,117 v211.5,117
230FUSED7  (via drill 0.61)
  Top 1.27: v244.5,22 244.5,30.02 244,30.52 | F8.1 208.33,18.83 209.33,19.83
  Top 1.422: v211.5,22 209.33,19.83 | v211.5,22 211.5,24.23 U$32.AC_L | U$30.4 244,30.52 242.88,30.52 U$29.6 | F8.1 208.33,18.83 v211.5,22
  Bottom 1.422: v244.5,22 v211.5,22
230IN
  Top 1.778: F1.2 23.26,13.75 IC1.IP+
  Top 3.81: 24.26,14.75 IC1.IP+ 29.21,10.78 X1.3
230IN1
  Top 1.778: F2.2 23.26,108.75 IC2.IP+
  Top 3.81: 24.26,109.75 IC2.IP+ 29.21,105.78 X2.3
230IN2
  Top 1.778: F3.2 88.26,13.75 IC3.IP+
  Top 3.81: 89.26,14.75 IC3.IP+ 94.21,10.78 X3.3
230IN3
  Top 1.778: F4.2 88.26,108.75 IC4.IP+
  Top 3.81: 89.26,109.75 IC4.IP+ 94.21,105.78 X4.3
230IN4
  Top 1.778: F5.2 153.26,13.75 IC5.IP+
  Top 3.81: 154.26,14.75 IC5.IP+ 159.21,10.78 X5.3
230IN5
  Top 1.778: F6.2 153.26,108.75 IC6.IP+
  Top 3.81: 154.26,109.75 IC6.IP+ 159.21,105.78 X6.3
230IN6
  Top 1.778: F7.2 218.26,108.75 IC7.IP+
  Top 3.81: 219.26,109.75 IC7.IP+ 224.21,105.78 X7.3
230IN7
  Top 1.778: F8.2 218.26,13.75 IC8.IP+
  Top 3.81: 219.26,14.75 IC8.IP+ 224.21,10.78 X8.3
230OUT
  Top 3.81: X1.4 34.29,10.78 IC1.IP-
230OUT1
  Top 3.81: X2.4 34.29,105.78 IC2.IP-
230OUT2
  Top 3.81: X3.4 99.29,10.78 IC3.IP-
230OUT3
  Top 3.81: X4.4 99.29,105.78 IC4.IP-
230OUT4
  Top 3.81: X5.4 164.29,10.78 IC5.IP-
230OUT5
  Top 3.81: X6.4 164.29,105.78 IC6.IP-
230OUT6
  Top 3.81: X7.4 229.29,105.78 IC7.IP-
230OUT7
  Top 3.81: X8.4 229.29,10.78 IC8.IP-
CURRENT
  Top 0.5: R4.1 C2.2 13.24,49.26 12,50.5 12,70.65 MDL1.ADC
CURRENT1
  Top 0.5: R8.1 C4.2 13.24,144.26 12,145.5 12,165.65 MDL2.ADC
CURRENT2
  Top 0.5: R12.1 C6.2 78.24,49.26 77,50.5 77,70.65 MDL3.ADC
CURRENT3
  Top 0.5: R16.1 C8.2 78.24,144.26 77,145.5 77,165.65 MDL4.ADC
CURRENT4
  Top 0.5: R20.1 C10.2 143.24,49.26 142,50.5 142,70.65 MDL5.ADC
CURRENT5
  Top 0.5: R24.1 C12.2 143.24,144.26 142,145.5 142,165.65 MDL6.ADC
CURRENT6
  Top 0.5: R28.1 C14.2 208.24,144.26 207,145.5 207,165.65 MDL7.ADC
CURRENT7
  Top 0.5: R32.1 C16.2 208.24,49.26 207,50.5 207,70.65 MDL8.ADC
GND  (1 unrouted)
  Top 0.5: 22.5,62.25 MDL1.GND | MDL1.GND 19.71,59.54 U$4.VO- 20.99,54.34 C2.1 32.48,54.34 C1.2 34.35,54.07 U$3.1 | MDL1.GND 19.76,62.24 17.5,64.5 | 17.5,64.5 17,65 17,75 22.5,78 34.5,78 35,77.5 37.5,77.5 40,75 | 17.5,64.5 17.5,70.5 8.5,78 1.5,78 1,77.5 1,71 2,70 3.04,70 SV1.5 1.45,69.95 1,69.5 1,59 1.5,58.5 1.5,54 14,41.5 31,41.5 31.75,40.75 IC1.2
  pour Top: 0,78 0,36.5 42,36.5 45,37 56,37 56,64.5 42,79
GND1  (1 unrouted)
  Top 0.5: 22.5,157.25 MDL2.GND | MDL2.GND 19.71,154.54 U$8.VO- 20.99,149.34 C4.1 32.48,149.34 C3.2 34.35,149.07 U$7.1 | MDL2.GND 19.76,157.24 17.5,159.5 | 17.5,159.5 17,160 17,170 22.5,173 34.5,173 35,172.5 37.5,172.5 40,170 | 17.5,159.5 17.5,165.5 8.5,173 1.5,173 1,172.5 1,166 2,165 3.04,165 SV2.5 1.45,164.95 1,164.5 1,154 1.5,153.5 1.5,149 14,136.5 31,136.5 31.75,135.75 IC2.2
  pour Top: 0,173 0,131.5 42,131.5 45,132 56,132 56,159.5 42,174
GND2  (1 unrouted)
  Top 0.5: 87.5,62.25 MDL3.GND | MDL3.GND 84.71,59.54 U$12.VO- 85.99,54.34 C6.1 97.48,54.34 C5.2 99.35,54.07 U$11.1 | MDL3.GND 84.76,62.24 82.5,64.5 | 82.5,64.5 82,65 82,75 87.5,78 99.5,78 100,77.5 102.5,77.5 105,75 | 82.5,64.5 82.5,70.5 73.5,78 66.5,78 66,77.5 66,71 67,70 68.04,70 SV3.5 66.45,69.95 66,69.5 66,59 66.5,58.5 66.5,54 79,41.5 96,41.5 96.75,40.75 IC3.2
  pour Top: 65,78 65,36.5 107,36.5 110,37 121,37 121,64.5 107,79
GND3  (1 unrouted)
  Top 0.5: 87.5,157.25 MDL4.GND | MDL4.GND 84.71,154.54 U$16.VO- 85.99,149.34 C8.1 97.48,149.34 C7.2 99.35,149.07 U$15.1 | MDL4.GND 84.76,157.24 82.5,159.5 | 82.5,159.5 82,160 82,170 87.5,173 99.5,173 100,172.5 102.5,172.5 105,170 | 82.5,159.5 82.5,165.5 73.5,173 66.5,173 66,172.5 66,166 67,165 68.04,165 SV4.5 66.45,164.95 66,164.5 66,154 66.5,153.5 66.5,149 79,136.5 96,136.5 96.75,135.75 IC4.2
  pour Top: 65,173 65,131.5 107,131.5 110,132 121,132 121,159.5 107,174
GND4  (1 unrouted)
  Top 0.5: 152.5,62.25 MDL5.GND | MDL5.GND 149.71,59.54 U$20.VO- 150.99,54.34 C10.1 162.48,54.34 C9.2 164.35,54.07 U$19.1 | MDL5.GND 149.76,62.24 147.5,64.5 | 147.5,64.5 147,65 147,75 152.5,78 164.5,78 165,77.5 167.5,77.5 170,75 | 147.5,64.5 147.5,70.5 138.5,78 131.5,78 131,77.5 131,71 132,70 133.04,70 SV5.5 131.45,69.95 131,69.5 131,59 131.5,58.5 131.5,54 144,41.5 161,41.5 161.75,40.75 IC5.2
  pour Top: 130,78 130,36.5 172,36.5 175,37 186,37 186,64.5 172,79
GND5  (1 unrouted)
  Top 0.5: 152.5,157.25 MDL6.GND | MDL6.GND 149.71,154.54 U$24.VO- 150.99,149.34 C12.1 162.48,149.34 C11.2 164.35,149.07 U$23.1 | MDL6.GND 149.76,157.24 147.5,159.5 | 147.5,159.5 147,160 147,170 152.5,173 164.5,173 165,172.5 167.5,172.5 170,170 | 147.5,159.5 147.5,165.5 138.5,173 131.5,173 131,172.5 131,166 132,165 133.04,165 SV6.5 131.45,164.95 131,164.5 131,154 131.5,153.5 131.5,149 144,136.5 161,136.5 161.75,135.75 IC6.2
  pour Top: 130,173 130,131.5 172,131.5 175,132 186,132 186,159.5 172,174
GND6  (1 unrouted)
  Top 0.5: 217.5,157.25 MDL7.GND | MDL7.GND 214.71,154.54 U$28.VO- 215.99,149.34 C14.1 227.48,149.34 C13.2 229.35,149.07 U$27.1 | MDL7.GND 214.76,157.24 212.5,159.5 | 212.5,159.5 212,160 212,170 217.5,173 229.5,173 230,172.5 232.5,172.5 235,170 | 212.5,159.5 212.5,165.5 203.5,173 196.5,173 196,172.5 196,166 197,165 198.04,165 SV7.5 196.45,164.95 196,164.5 196,154 196.5,153.5 196.5,149 209,136.5 226,136.5 226.75,135.75 IC7.2
  pour Top: 195,173 195,131.5 237,131.5 240,132 251,132 251,159.5 237,174
GND7  (1 unrouted)
  Top 0.5: 217.5,62.25 MDL8.GND | MDL8.GND 214.71,59.54 U$32.VO- 215.99,54.34 C16.1 227.48,54.34 C15.2 229.35,54.07 U$31.1 | MDL8.GND 214.76,62.24 212.5,64.5 | 212.5,64.5 212,65 212,75 217.5,78 229.5,78 230,77.5 232.5,77.5 235,75 | 212.5,64.5 212.5,70.5 203.5,78 196.5,78 196,77.5 196,71 197,70 198.04,70 SV8.5 196.45,69.95 196,69.5 196,59 196.5,58.5 196.5,54 209,41.5 226,41.5 226.75,40.75 IC8.2
  pour Top: 195,78 195,36.5 237,36.5 240,37 251,37 251,64.5 237,79
N$1
  Top 1.27: D2.C 52.92,15.92 53.5,17 53.5,29.87 U$2.6
N$2
  Top 0.5: R1.2 45.5,54 48,51.5 48,36.99 U$1.1
N$3
  Top 0.5: IC1.3 29.21,37.27 R4.2
N$4
  Top 1.27: U$1.4 45.26,19.74 49,16 49,15.04 D1.A
N$5
  Top 0.61: SV1.2 4.83,62.33 6.5,64 8.17,64 MDL1.GPIO13
N$6
  Top 0.61: SV1.3 4.87,64.87 6,66 8.17,66 MDL1.GPIO12
N$7
  Top 0.61: SV1.4 5.41,67.41 6,68 8.17,68 MDL1.GPIO14
N$8
  Top 0.5: U$2.1 53.35,51.49 R2.2
N$9
  Top 0.5: MDL1.GPIO15 27.74,64.24 R3.2 28.69,61.81 31.5,59 36.1,59 U$3.2
N$10
  Top 0.61: R1.1 45.5,66 41.5,70 22.65,70 MDL1.GPIO5
N$11
  Top 0.61: MDL1.GPIO4 42.76,72.24 49.5,65.5 49.5,63.18 R2.1
N$12
  Top 0.406: 0,0 56,0 56,79 0,79
N$13
  Top 0.5: MDL1.CH_PD 6.26,72.24 5,73.5 JP4.1
N$14
  Top 0.5: JP1.1 22.67,76.5 MDL1.TX
N$15
  Top 0.5: JP2.1 22.65,74 MDL1.RX
N$16
  Top 0.5: JP3.1 22.65,68 MDL1.GPIO0
N$17
  Top 0.5: MDL1.RESET 3.26,76.24 JP5.1
N$18
  Top 0.5: R5.2 45.5,149 48,146.5 48,131.99 U$5.1
N$19
  Top 0.5: U$6.1 53.35,146.49 R6.2
N$20
  Top 0.5: IC2.3 29.21,132.27 R8.2
N$21
  Top 1.27: U$5.4 45.26,114.74 49,111 49,110.04 D3.A
N$22
  Top 1.27: D4.C 52.92,110.92 53.5,112 53.5,124.87 U$6.6
N$23
  Top 0.61: SV2.2 4.83,157.33 6.5,159 8.17,159 MDL2.GPIO13
N$24
  Top 0.61: SV2.3 4.87,159.87 6,161 8.17,161 MDL2.GPIO12
N$25
  Top 0.61: SV2.4 5.41,162.41 6,163 8.17,163 MDL2.GPIO14
N$26
  Top 0.5: MDL2.GPIO15 27.74,159.24 R7.2 28.69,156.81 31.5,154 36.1,154 U$7.2
N$27
  Top 0.61: R5.1 45.5,161 41.5,165 22.65,165 MDL2.GPIO5
N$28
  Top 0.61: MDL2.GPIO4 42.76,167.24 49.5,160.5 49.5,158.18 R6.1
N$29
  Top 0.406: 0,95 56,95 56,174 0,174
N$30
  Top 0.5: MDL2.CH_PD 6.26,167.24 5,168.5 JP9.1
N$31
  Top 0.5: JP6.1 22.67,171.5 MDL2.TX
N$32
  Top 0.5: JP7.1 22.65,169 MDL2.RX
N$33
  Top 0.5: JP8.1 22.65,163 MDL2.GPIO0
N$34
  Top 0.5: MDL2.RESET 3.26,171.24 JP10.1
N$35
  Top 0.5: R9.2 110.5,54 113,51.5 113,36.99 U$9.1
N$36
  Top 0.5: U$10.1 118.35,51.49 R10.2
N$37
  Top 0.5: IC3.3 94.21,37.27 R12.2
N$38
  Top 1.27: U$9.4 110.26,19.74 114,16 114,15.04 D5.A
N$39
  Top 1.27: D6.C 117.92,15.92 118.5,17 118.5,29.87 U$10.6
N$40
  Top 0.61: SV3.2 69.83,62.33 71.5,64 73.17,64 MDL3.GPIO13
N$41
  Top 0.61: SV3.3 69.87,64.87 71,66 73.17,66 MDL3.GPIO12
N$42
  Top 0.61: SV3.4 70.41,67.41 71,68 73.17,68 MDL3.GPIO14
N$43
  Top 0.5: MDL3.GPIO15 92.74,64.24 R11.2 93.69,61.81 96.5,59 101.11,59 U$11.2
N$44
  Top 0.61: R9.1 110.5,66 106.5,70 87.65,70 MDL3.GPIO5
N$45
  Top 0.61: MDL3.GPIO4 107.76,72.24 114.5,65.5 114.5,63.18 R10.1
N$46
  Top 0.406: 65,0 121,0 121,79 65,79
N$47
  Top 0.5: MDL3.CH_PD 71.26,72.24 70,73.5 JP14.1
N$48
  Top 0.5: JP11.1 87.67,76.5 MDL3.TX
N$49
  Top 0.5: JP12.1 87.65,74 MDL3.RX
N$50
  Top 0.5: JP13.1 87.65,68 MDL3.GPIO0
N$51
  Top 0.5: MDL3.RESET 68.26,76.24 JP15.1
N$52
  Top 0.5: R13.2 110.5,149 113,146.5 113,131.99 U$13.1
N$53
  Top 0.5: U$14.1 118.35,146.49 R14.2
N$54
  Top 0.5: IC4.3 94.21,132.27 R16.2
N$55
  Top 1.27: U$13.4 110.26,114.74 114,111 114,110.04 D7.A
N$56
  Top 1.27: D8.C 117.92,110.92 118.5,112 118.5,124.87 U$14.6
N$57
  Top 0.61: SV4.2 69.83,157.33 71.5,159 73.17,159 MDL4.GPIO13
N$58
  Top 0.61: SV4.3 69.87,159.87 71,161 73.17,161 MDL4.GPIO12
N$59
  Top 0.61: SV4.4 70.41,162.41 71,163 73.17,163 MDL4.GPIO14
N$60
  Top 0.5: MDL4.GPIO15 92.74,159.24 R15.2 93.69,156.81 96.5,154 101.11,154 U$15.2
N$61
  Top 0.61: R13.1 110.5,161 106.5,165 87.65,165 MDL4.GPIO5
N$62
  Top 0.61: MDL4.GPIO4 107.76,167.24 114.5,160.5 114.5,158.18 R14.1
N$63
  Top 0.406: 65,95 121,95 121,174 65,174
N$64
  Top 0.5: MDL4.CH_PD 71.26,167.24 70,168.5 JP19.1
N$65
  Top 0.5: JP16.1 87.67,171.5 MDL4.TX
N$66
  Top 0.5: JP17.1 87.65,169 MDL4.RX
N$67
  Top 0.5: JP18.1 87.65,163 MDL4.GPIO0
N$68
  Top 0.5: MDL4.RESET 68.26,171.24 JP20.1
N$69
  Top 0.5: R17.2 175.5,54 178,51.5 178,36.99 U$17.1
N$70
  Top 0.5: U$18.1 183.35,51.49 R18.2
N$71
  Top 0.5: IC5.3 159.21,37.27 R20.2
N$72
  Top 1.27: U$17.4 175.26,19.74 179,16 179,15.04 D9.A
N$73
  Top 1.27: D10.C 182.92,15.92 183.5,17 183.5,29.87 U$18.6
N$74
  Top 0.61: SV5.2 134.83,62.33 136.5,64 138.17,64 MDL5.GPIO13
N$75
  Top 0.61: SV5.3 134.87,64.87 136,66 138.17,66 MDL5.GPIO12
N$76
  Top 0.61: SV5.4 135.41,67.41 136,68 138.17,68 MDL5.GPIO14
N$77
  Top 0.5: MDL5.GPIO15 157.74,64.24 R19.2 158.69,61.81 161.5,59 166.1,59 U$19.2
N$78
  Top 0.61: R17.1 175.5,66 171.5,70 152.65,70 MDL5.GPIO5
N$79
  Top 0.61: MDL5.GPIO4 172.76,72.24 179.5,65.5 179.5,63.18 R18.1
N$80
  Top 0.406: 130,0 186,0 186,79 130,79
N$81
  Top 0.5: MDL5.CH_PD 136.26,72.24 135,73.5 JP24.1
N$82
  Top 0.5: JP21.1 152.67,76.5 MDL5.TX
N$83
  Top 0.5: JP22.1 152.65,74 MDL5.RX
N$84
  Top 0.5: JP23.1 152.65,68 MDL5.GPIO0
N$85
  Top 0.5: MDL5.RESET 133.26,76.24 JP25.1
N$86
  Top 0.5: R21.2 175.5,149 178,146.5 178,131.99 U$21.1
N$87
  Top 0.5: U$22.1 183.35,146.49 R22.2
N$88
  Top 0.5: IC6.3 159.21,132.27 R24.2
N$89
  Top 1.27: U$21.4 175.26,114.74 179,111 179,110.04 D11.A
N$90
  Top 1.27: D12.C 182.92,110.92 183.5,112 183.5,124.87 U$22.6
N$91
  Top 0.61: SV6.2 134.83,157.33 136.5,159 138.17,159 MDL6.GPIO13
N$92
  Top 0.61: SV6.3 134.87,159.87 136,161 138.17,161 MDL6.GPIO12
N$93
  Top 0.61: SV6.4 135.41,162.41 136,163 138.17,163 MDL6.GPIO14
N$94
  Top 0.5: MDL6.GPIO15 157.74,159.24 R23.2 158.69,156.81 161.5,154 166.1,154 U$23.2
N$95
  Top 0.61: R21.1 175.5,161 171.5,165 152.65,165 MDL6.GPIO5
N$96
  Top 0.61: MDL6.GPIO4 172.76,167.24 179.5,160.5 179.5,158.18 R22.1
N$97
  Top 0.406: 130,95 186,95 186,174 130,174
N$98
  Top 0.5: MDL6.CH_PD 136.26,167.24 135,168.5 JP29.1
N$99
  Top 0.5: JP26.1 152.67,171.5 MDL6.TX
N$100
  Top 0.5: JP27.1 152.65,169 MDL6.RX
N$101
  Top 0.5: JP28.1 152.65,163 MDL6.GPIO0
N$102
  Top 0.5: MDL6.RESET 133.26,171.24 JP30.1
N$103
  Top 0.5: R25.2 240.5,149 243,146.5 243,131.99 U$25.1
N$104
  Top 0.5: U$26.1 248.35,146.49 R26.2
N$105
  Top 0.5: IC7.3 224.21,132.27 R28.2
N$106
  Top 1.27: U$25.4 240.26,114.74 244,111 244,110.04 D13.A
N$107
  Top 1.27: D14.C 247.92,110.92 248.5,112 248.5,124.87 U$26.6
N$108
  Top 0.61: SV7.2 199.83,157.33 201.5,159 203.17,159 MDL7.GPIO13
N$109
  Top 0.61: SV7.3 199.87,159.87 201,161 203.17,161 MDL7.GPIO12
N$110
  Top 0.61: SV7.4 200.41,162.41 201,163 203.17,163 MDL7.GPIO14
N$111
  Top 0.5: MDL7.GPIO15 222.74,159.24 R27.2 223.69,156.81 226.5,154 231.1,154 U$27.2
N$112
  Top 0.61: R25.1 240.5,161 236.5,165 217.65,165 MDL7.GPIO5
N$113
  Top 0.61: MDL7.GPIO4 237.76,167.24 244.5,160.5 244.5,158.18 R26.1
N$114
  Top 0.406: 195,95 251,95 251,174 195,174
N$115
  Top 0.5: MDL7.CH_PD 201.26,167.24 200,168.5 JP34.1
N$116
  Top 0.5: JP31.1 217.67,171.5 MDL7.TX
N$117
  Top 0.5: JP32.1 217.65,169 MDL7.RX
N$118
  Top 0.5: JP33.1 217.65,163 MDL7.GPIO0
N$119
  Top 0.5: MDL7.RESET 198.26,171.24 JP35.1
N$120
  Top 0.5: R29.2 240.5,54 243,51.5 243,36.99 U$29.1
N$121
  Top 0.5: U$30.1 248.35,51.49 R30.2
N$122
  Top 0.5: IC8.3 224.21,37.27 R32.2
N$123
  Top 1.27: U$29.4 240.26,19.74 244,16 244,15.04 D15.A
N$124
  Top 1.27: D16.C 247.92,15.92 248.5,17 248.5,29.87 U$30.6
N$125
  Top 0.61: SV8.2 199.83,62.33 201.5,64 203.17,64 MDL8.GPIO13
N$126
  Top 0.61: SV8.3 199.87,64.87 201,66 203.17,66 MDL8.GPIO12
N$127
  Top 0.61: SV8.4 200.41,67.41 201,68 203.17,68 MDL8.GPIO14
N$128
  Top 0.5: MDL8.GPIO15 222.74,64.24 R31.2 223.69,61.81 226.5,59 231.1,59 U$31.2
N$129
  Top 0.61: R29.1 240.5,66 236.5,70 217.65,70 MDL8.GPIO5
N$130
  Top 0.61: MDL8.GPIO4 237.76,72.24 244.5,65.5 244.5,63.18 R30.1
N$131
  Top 0.406: 195,0 251,0 251,79 195,79
N$132
  Top 0.5: MDL8.CH_PD 201.26,72.24 200,73.5 JP39.1
N$133
  Top 0.5: JP36.1 217.67,76.5 MDL8.TX
N$134
  Top 0.5: JP37.1 217.65,74 MDL8.RX
N$135
  Top 0.5: JP38.1 217.65,68 MDL8.GPIO0
N$136
  Top 0.5: MDL8.RESET 198.26,76.24 JP40.1
NEUTRAL
  Top 1.778: U$4.AC_N 5.22,26.22 2.5,23.5 2.5,5.5 3.5,4.5 19,4.5 X1.1
  Top 3.81: X1.1 X1.2
NEUTRAL1
  Top 1.778: U$8.AC_N 5.22,121.22 2.5,118.5 2.5,100.5 3.5,99.5 19,99.5 X2.1
  Top 3.81: X2.1 X2.2
NEUTRAL2
  Top 1.778: U$12.AC_N 70.22,26.22 67.5,23.5 67.5,5.5 68.5,4.5 84,4.5 X3.1
  Top 3.81: X3.1 X3.2
NEUTRAL3
  Top 1.778: U$16.AC_N 70.22,121.22 67.5,118.5 67.5,100.5 68.5,99.5 84,99.5 X4.1
  Top 3.81: X4.1 X4.2
NEUTRAL4
  Top 1.778: U$20.AC_N 135.22,26.22 132.5,23.5 132.5,5.5 133.5,4.5 149,4.5 X5.1
  Top 3.81: X5.1 X5.2
NEUTRAL5
  Top 1.778: U$24.AC_N 135.22,121.22 132.5,118.5 132.5,100.5 133.5,99.5 149,99.5 X6.1
  Top 3.81: X6.1 X6.2
NEUTRAL6
  Top 1.778: U$28.AC_N 200.22,121.22 197.5,118.5 197.5,100.5 198.5,99.5 214,99.5 X7.1
  Top 3.81: X7.1 X7.2
NEUTRAL7
  Top 1.778: U$32.AC_N 200.22,26.22 197.5,23.5 197.5,5.5 198.5,4.5 214,4.5 X8.1
  Top 3.81: X8.1 X8.2
PILOTE
  Top 1.27: 46.5,4.5 46,4.5 | 46,4.5 39.42,4.5 X1.5 | 46,4.5 48.62,4.5 D1.C 52.91,4.66 D2.A
PILOTE1
  Top 1.27: 46.5,99.5 46,99.5 | 46,99.5 39.42,99.5 X2.5 | 46,99.5 48.62,99.5 D3.C 52.91,99.67 D4.A
PILOTE2
  Top 1.27: 111.5,4.5 111,4.5 | 111,4.5 104.42,4.5 X3.5 | 111,4.5 113.62,4.5 D5.C 117.91,4.66 D6.A
PILOTE3
  Top 1.27: 111.5,99.5 111,99.5 | 111,99.5 104.42,99.5 X4.5 | 111,99.5 113.62,99.5 D7.C 117.91,99.67 D8.A
PILOTE4
  Top 1.27: 176.5,4.5 176,4.5 | 176,4.5 169.43,4.5 X5.5 | 176,4.5 178.62,4.5 D9.C 182.91,4.66 D10.A
PILOTE5
  Top 1.27: 176.5,99.5 176,99.5 | 176,99.5 169.43,99.5 X6.5 | 176,99.5 178.62,99.5 D11.C 182.91,99.67 D12.A
PILOTE6
  Top 1.27: 241.5,99.5 241,99.5 | 241,99.5 234.43,99.5 X7.5 | 241,99.5 243.62,99.5 D13.C 247.91,99.67 D14.A
PILOTE7
  Top 1.27: 241.5,4.5 241,4.5 | 241,4.5 234.43,4.5 X8.5 | 241,4.5 243.62,4.5 D15.C 247.91,4.66 D16.A
VCC
  Top 0.5: 34,36.75 IC1.1 35.56,38.54 35.56,43 | 35.56,43 15,43 4.31,53.69 U$4.VO+ | 35.56,43 37.83,45.27 C1.1 39.07,54.07 41.5,56.5 41.5,58.5 39.5,60.5 U$3.3 38.24,61.36 R3.1
  Top 0.813: SV1.1 4.31,58.57 U$4.VO+ 4.62,55.62 8.5,59.5 8.5,62.15 MDL1.VCC
VCC1
  Top 0.5: 34,131.75 IC2.1 35.56,133.54 35.56,138 | 35.56,138 15,138 4.31,148.69 U$8.VO+ | 35.56,138 37.83,140.27 C3.1 39.07,149.07 41.5,151.5 41.5,153.5 39.5,155.5 U$7.3 38.24,156.36 R7.1
  Top 0.813: SV2.1 4.31,153.57 U$8.VO+ 4.62,150.62 8.5,154.5 8.5,157.15 MDL2.VCC
VCC2
  Top 0.5: 99,36.75 IC3.1 100.56,38.54 100.56,43 | 100.56,43 80,43 69.31,53.69 U$12.VO+ | 100.56,43 102.83,45.27 C5.1 104.07,54.07 106.5,56.5 106.5,58.5 104.5,60.5 U$11.3 103.24,61.36 R11.1
  Top 0.813: SV3.1 69.31,58.57 U$12.VO+ 69.62,55.62 73.5,59.5 73.5,62.15 MDL3.VCC
VCC3
  Top 0.5: 99,131.75 IC4.1 100.56,133.54 100.56,138 | 100.56,138 80,138 69.31,148.69 U$16.VO+ | 100.56,138 102.83,140.27 C7.1 104.07,149.07 106.5,151.5 106.5,153.5 104.5,155.5 U$15.3 103.24,156.36 R15.1
  Top 0.813: SV4.1 69.31,153.57 U$16.VO+ 69.62,150.62 73.5,154.5 73.5,157.15 MDL4.VCC
VCC4
  Top 0.5: 164,36.75 IC5.1 165.56,38.54 165.56,43 | 165.56,43 145,43 134.31,53.69 U$20.VO+ | 165.56,43 167.83,45.27 C9.1 169.07,54.07 171.5,56.5 171.5,58.5 169.5,60.5 U$19.3 168.24,61.36 R19.1
  Top 0.813: SV5.1 134.31,58.57 U$20.VO+ 134.62,55.62 138.5,59.5 138.5,62.15 MDL5.VCC
VCC5
  Top 0.5: 164,131.75 IC6.1 165.56,133.54 165.56,138 | 165.56,138 145,138 134.31,148.69 U$24.VO+ | 165.56,138 167.83,140.27 C11.1 169.07,149.07 171.5,151.5 171.5,153.5 169.5,155.5 U$23.3 168.24,156.36 R23.1
  Top 0.813: SV6.1 134.31,153.57 U$24.VO+ 134.62,150.62 138.5,154.5 138.5,157.15 MDL6.VCC
VCC6
  Top 0.5: 229,131.75 IC7.1 230.56,133.54 230.56,138 | 230.56,138 210,138 199.31,148.69 U$28.VO+ | 230.56,138 232.83,140.27 C13.1 234.07,149.07 236.5,151.5 236.5,153.5 234.5,155.5 U$27.3 233.24,156.36 R27.1
  Top 0.813: SV7.1 199.31,153.57 U$28.VO+ 199.62,150.62 203.5,154.5 203.5,157.15 MDL7.VCC
VCC7
  Top 0.5: 229,36.75 IC8.1 230.56,38.54 230.56,43 | 230.56,43 210,43 199.31,53.69 U$32.VO+ | 230.56,43 232.83,45.27 C15.1 234.07,54.07 236.5,56.5 236.5,58.5 234.5,60.5 U$31.3 233.24,61.36 R31.1
  Top 0.813: SV8.1 199.31,58.57 U$32.VO+ 199.62,55.62 203.5,59.5 203.5,62.15 MDL8.VCC

## Text on the board
Top: ESP Pilote++ | ESP Pilote++ | ESP Pilote++ | ESP Pilote++ | Issac is the best | Issac is the best | Issac is the best | Issac is the best | ! HIGH VOLTAGE ! | ! HIGH VOLTAGE ! | ! HIGH VOLTAGE ! | ! HIGH VOLTAGE ! | ! HIGH VOLTAGE ! | ! HIGH VOLTAGE ! | ! HIGH VOLTAGE ! | ! HIGH VOLTAGE ! | ESP Pilote++ | ESP Pilote++ | ESP Pilote++ | ESP Pilote++ | Issac is the best | Issac is the best | Issac is the best | Issac is the best | ! HIGH VOLTAGE ! | ! HIGH VOLTAGE ! | ! HIGH VOLTAGE ! | ! HIGH VOLTAGE ! | ! HIGH VOLTAGE ! | ! HIGH VOLTAGE ! | ! HIGH VOLTAGE ! | ! HIGH VOLTAGE !